# Altium PCB mchf_pro_ui.PcbDoc (part 4 of 7)
Units mil, origin at the board's own origin, x right, y up, seen from the top; angles counter-clockwise.
Board outline 7877.73 x 5661.04 mil, 2 copper layers (Top Layer, Bottom Layer); 345 components, 345 nets, 1318 pads, 783 vias.
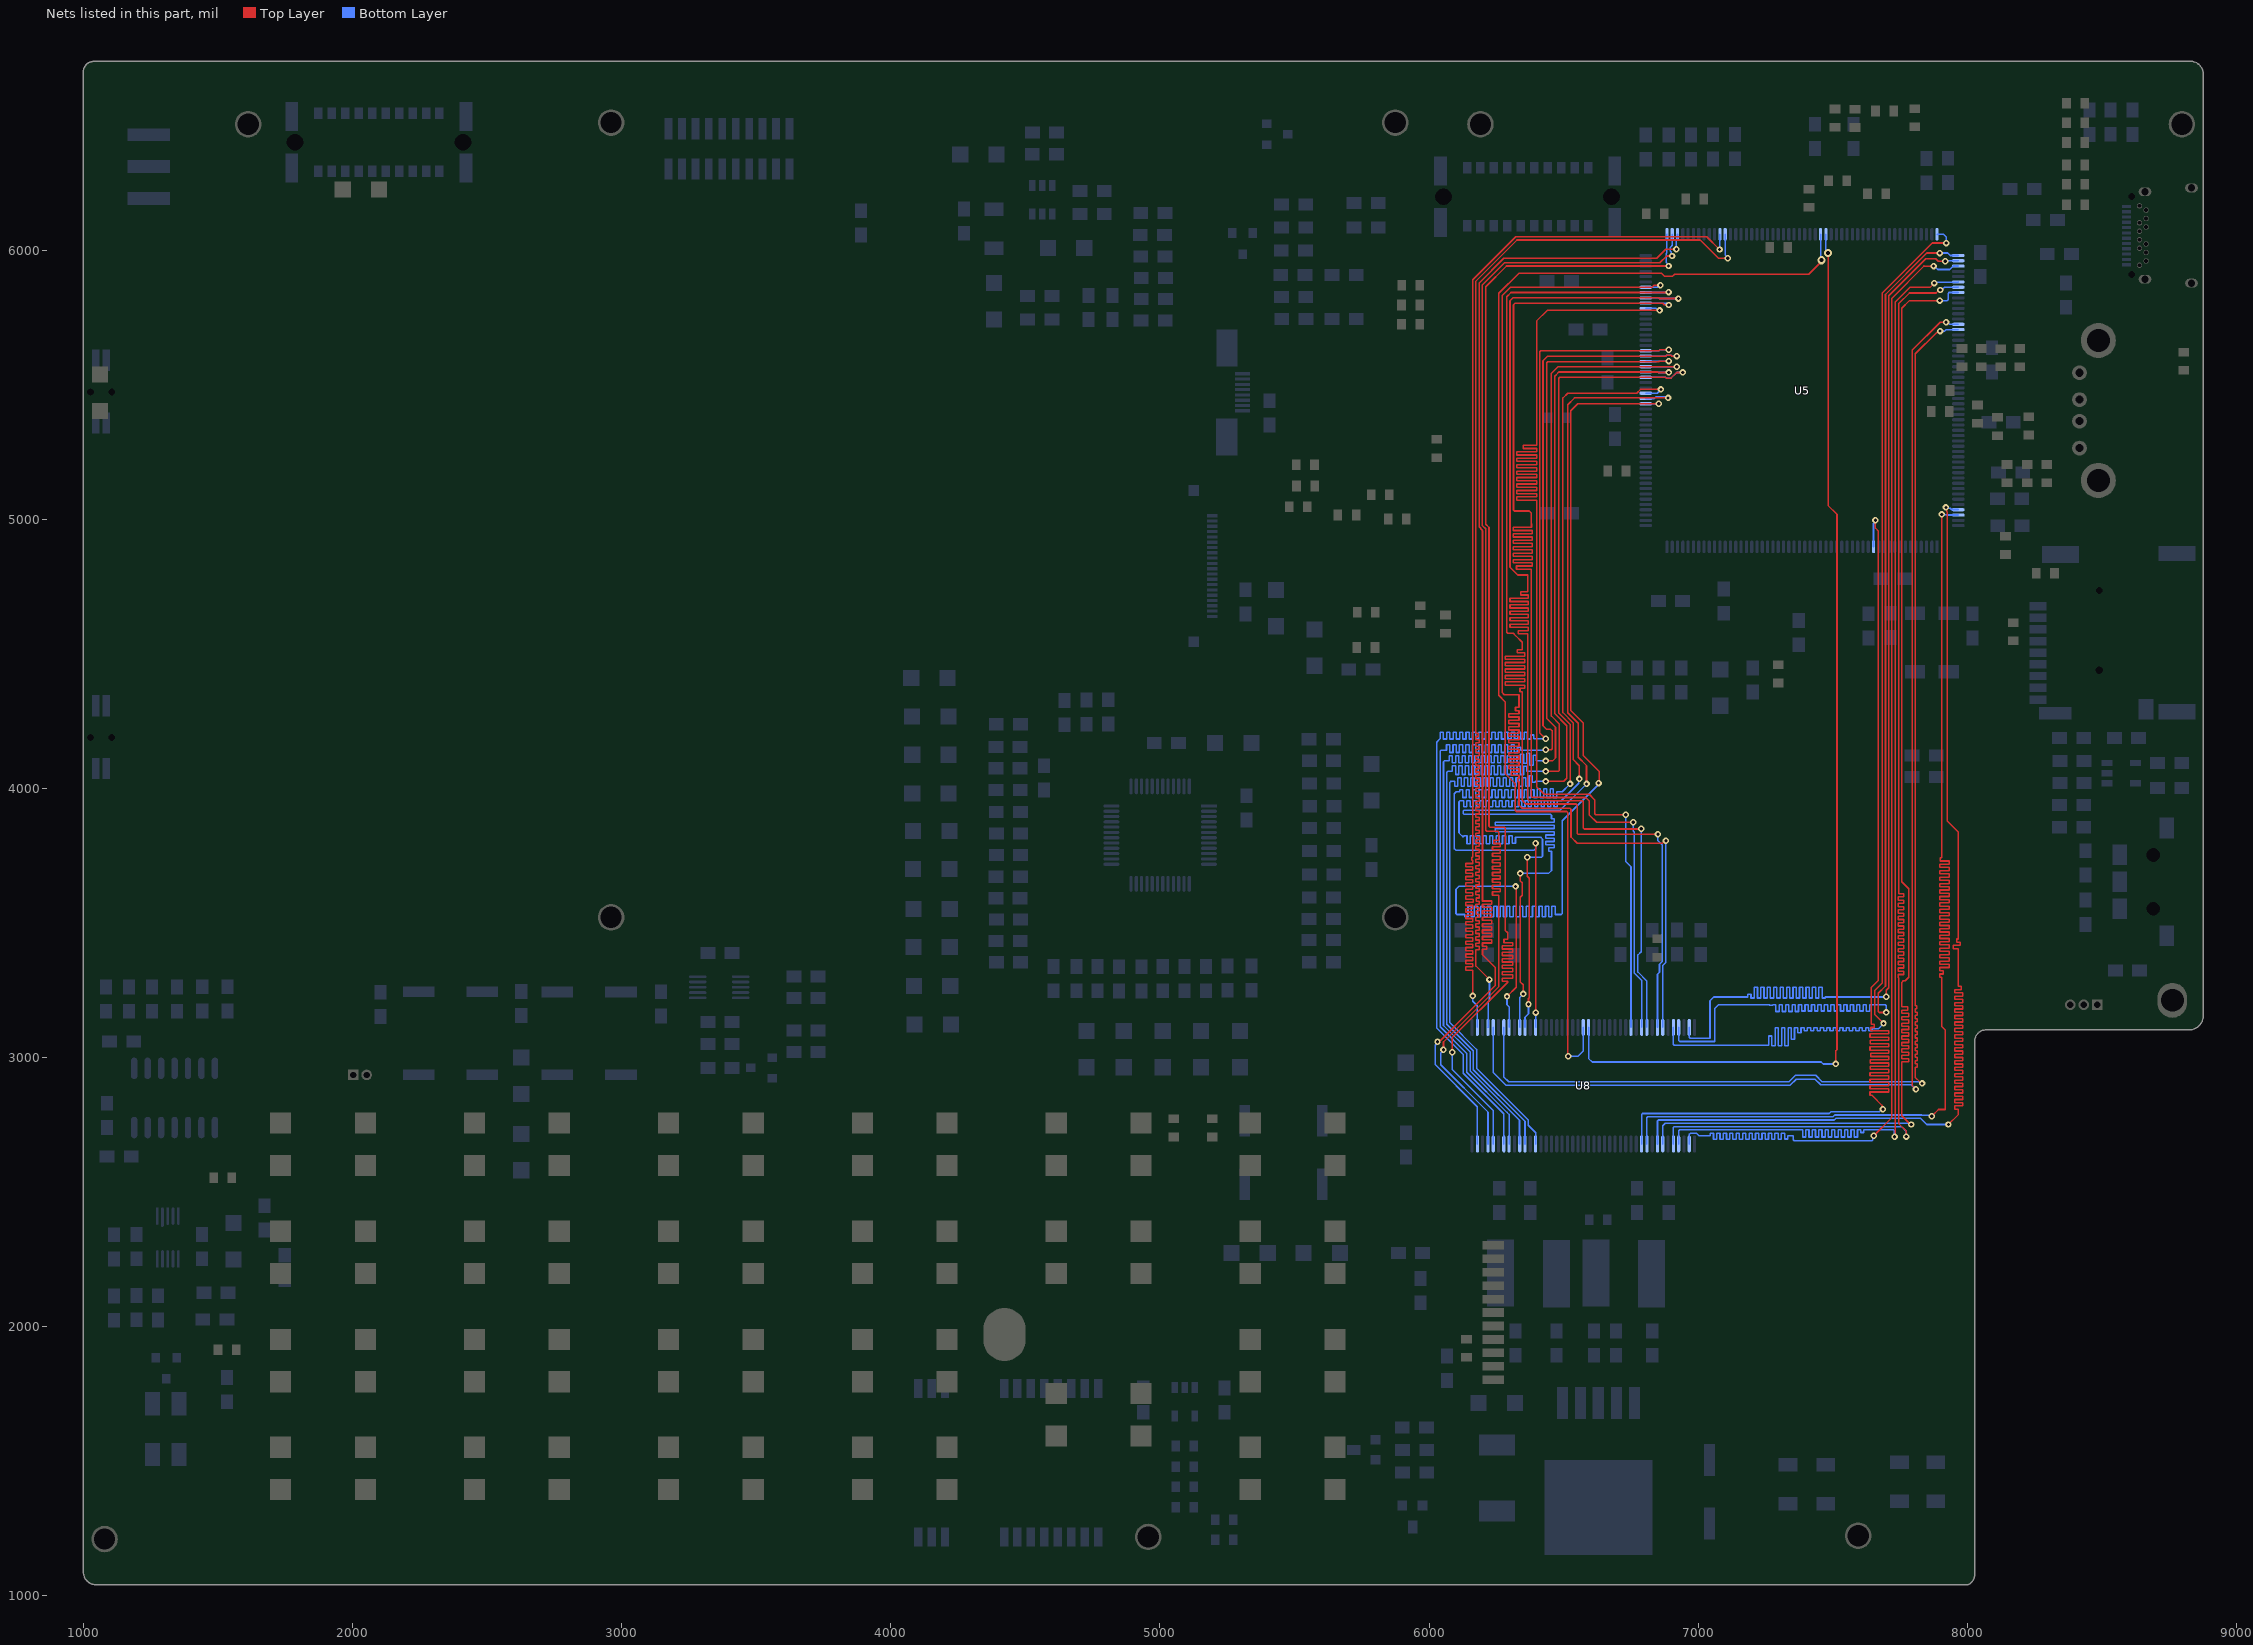
[diagram p3: the nets of this part, all layers, seen from the top]

## Via types
v1: diameter 24, hole 12, Top Layer to Bottom Layer, 779 vias
v2: diameter 30, hole 15, Top Layer to Bottom Layer, 4 vias

## Nets (pads, with @x,y where several pads share a name; then routed paths per layer and width w, separated by ;. In a path a pad name is that pad's centre, name@x,y a point inside that pad or via, vN(x,y) a via of type N, cw(c..) or ccw(c..) an arc to the next point about the centre after c; other vN are vias at no path point) (continued)
FMC_BA0: U5.134 U8.22 | length 4565.1
  Top Layer w6: v1(6517.54,3005.01) 6515.52,3007.03 6515.52,3911.33 6512.01,3914.85 6323.42,3914.85 6319.52,3918.74 6319.52,4018.98 6282.5,4056.01 6282.5,4322.66 6258.87,4346.29 6258.87,5840.13 6333.95,5915.21 6863.47,5915.21 6863.47,5914.26 6874.46,5903.27 6879.43,5903.27 6879.64,5903.48 6904.76,5903.48 6912.52,5911.24 7410.8,5911.24 7457.52,5957.97 v2(7457.52,5963.21)
  Bottom Layer w6: v1(6517.54,3005.01) 6553.39,3005.01 6573.08,3024.7 U8.22@6573.08,3112.61 ; U5.134@7454.69,6059.62 7454.69,5966.04 v2(7457.52,5963.21)
FMC_BA1: U5.135 U8.23 | length 4139.9
  Top Layer w6: v2(7482.52,5990.78) 7482.52,5051.78 7515.52,5018.78 7515.52,3030.03 7510.86,3025.36 v1(7510.86,2976.74)
  Bottom Layer w6: U8.23@6592.76,3112.61 6592.76,2997.38 6606.2,2983.95 7456.71,2983.95 7463.91,2976.74 v1(7510.86,2976.74) ; v2@7474.38,5991.21 U5.135@7474.38,6059.62
FMC_D0: U5.115 U8.2 | length 4744
  Top Layer w6: v1(6162.11,3229.59) 6162.11,3322.41 6162.11,3325.42 6135.99,3325.42 6135.99,3337.42 6162.11,3337.42 6162.11,3349.42 6135.99,3349.42 6135.99,3361.42 6162.11,3361.42 6162.11,3373.42 6135.99,3373.42 6135.99,3385.42 6162.11,3385.42 6162.11,3397.42 6135.99,3397.42 6135.99,3409.42 6162.11,3409.42 6162.11,3421.42 6135.99,3421.42 6135.99,3433.42 6162.11,3433.42 6162.11,3445.42 6135.99,3445.42 6135.99,3457.42 6162.11,3457.42 6162.11,3469.42 6135.99,3469.42 6135.99,3481.42 6162.11,3481.42 6162.11,3493.42 6135.99,3493.42 6135.99,3505.42 6162.11,3505.42 6162.11,3517.42 6135.99,3517.42 6135.99,3529.42 6162.86,3529.42 6162.86,3541.42 6135.99,3541.42 6135.99,3553.42 6162.11,3553.42 6162.11,3565.42 6135.99,3565.42 6135.99,3577.42 6163.62,3577.42 6163.62,3589.42 6135.99,3589.42 6135.99,3601.42 6162.11,3601.42 6162.11,3613.42 6135.99,3613.42 6135.99,3625.42 6162.25,3625.42 6162.25,3637.42 6135.99,3637.42 6135.99,3649.42 6162.11,3649.42 6162.11,3661.42 6135.99,3661.42 6135.99,3673.42 6162.11,3673.42 6162.11,3685.42 6135.99,3685.42 6135.99,3697.42 6162.11,3697.42 6162.11,3709.42 6135.99,3709.42 6135.99,3721.42 6162.11,3721.42 6162.11,3733.42 6159.22,3733.42 6159.22,3745.42 6162.11,3745.42 6162.11,3767.68 6162.11,5890.73 6321.65,6050.28 7032.16,6050.28 7079.36,6003.08 v1(7079.36,6003.02)
  Bottom Layer w6: v1(6162.11,3229.59) 6162.11,3209.87 6179.38,3192.6 U8.2@6179.38,3112.61 ; v1(7079.36,6003.02) 7079.36,6008.89 7080.68,6010.21 U5.115@7080.67,6059.62
FMC_D1: U5.116 U8.4 | length 4748.1
  Top Layer w6: v1(6224.37,3290.3) 6174.11,3340.56 6174.11,3386.58 6174.11,3401.58 6186.52,3401.58 6186.52,3413.58 6174.11,3413.58 6174.11,3425.58 6186.52,3425.58 6186.52,3437.58 6174.11,3437.58 6174.11,3449.58 6186.52,3449.58 6186.52,3461.58 6174.11,3461.58 6174.11,3473.58 6186.52,3473.58 6186.52,3485.58 6174.11,3485.58 6174.11,3497.58 6186.52,3497.58 6186.52,3509.58 6174.11,3509.58 6174.11,3521.58 6186.52,3521.58 6186.52,3533.58 6174.86,3533.58 6174.86,3545.58 6186.49,3545.58 6186.49,3557.58 6174.11,3557.58 6174.11,3569.58 6186.46,3569.58 6186.46,3581.58 6175.62,3581.58 6175.62,3593.58 6186.52,3593.58 6186.52,3605.58 6174.11,3605.58 6174.11,3617.58 6186.52,3617.58 6186.52,3629.58 6174.25,3629.58 6174.25,3641.58 6186.52,3641.58 6186.52,3653.58 6174.11,3653.58 6174.11,3665.58 6186.52,3665.58 6186.52,3677.58 6174.11,3677.58 6174.11,3689.58 6186.52,3689.58 6186.52,3701.58 6174.11,3701.58 6174.11,3713.58 6186.52,3713.58 6186.52,3725.58 6174.11,3725.58 6174.11,3737.58 6186.52,3737.58 6186.52,3749.58 6174.11,3749.58 6174.11,3761.58 6186.52,3761.58 6186.52,3773.58 6174.11,3773.58 6174.11,3785.58 6186.52,3785.58 6186.52,3797.58 6174.11,3797.58 6174.11,3809.58 6186.52,3809.58 6186.52,3821.58 6174.11,3821.58 6174.11,3833.58 6186.52,3833.58 6186.52,3845.58 6174.11,3845.58 6174.11,3857.58 6186.52,3857.58 6186.52,3869.58 6174.11,3869.58 6174.11,3881.58 6186.52,3881.58 6186.52,3893.58 6174.11,3893.58 6174.11,3905.58 6186.52,3905.58 6186.52,3917.58 6174.11,3917.58 6174.11,3929.58 6186.52,3929.58 6186.52,3941.58 6174.11,3941.58 6174.11,3953.58 6186.52,3953.58 6186.52,3965.58 6174.11,3965.58 6174.11,3977.58 6186.52,3977.58 6186.52,3989.58 6174.11,3989.58 6174.11,4001.58 6186.52,4001.58 6186.52,4013.58 6174.11,4013.58 6174.11,4025.58 6186.52,4025.58 6186.52,4037.58 6174.11,4037.58 6174.11,4049.58 6186.52,4049.58 6186.52,4061.58 6174.11,4061.58 6174.11,4073.58 6186.52,4073.58 6186.52,4085.58 6174.11,4085.58 6174.11,4097.58 6186.52,4097.58 6186.52,4109.58 6174.11,4109.58 6174.11,4121.58 6186.52,4121.58 6186.52,4133.58 6174.11,4133.58 6174.11,4145.58 6186.52,4145.58 6186.52,4157.58 6174.11,4157.58 6174.11,4169.58 6186.52,4169.58 6186.52,4181.58 6174.11,4181.58 6174.11,4193.58 6182.91,4193.58 6182.91,4205.58 6174.11,4205.58 6174.11,4219.52 6174.11,5885.76 6326.62,6038.28 7007.69,6038.28 7075.64,5970.33 v1(7109.62,5970.33)
  Bottom Layer w6: U8.4@6218.75,3112.61 6219.86,3113.72 6219.86,3207.44 6224.37,3211.95 v1(6224.37,3290.3) ; U5.116@7100.36,6059.62 7100.36,5982.84 7109.62,5973.59 v1(7109.62,5970.33)
FMC_D2: U5.170 U8.5 | length 4751.2
  Top Layer w6: v1(7808.85,2882.76) 7794.76,2896.85 7794.76,5628.17 7899.21,5732.62 v1(7920.96,5732.62)
  Bottom Layer w6: U8.5@6238.43,3112.61 6238.43,2945.25 6285.33,2898.36 7342.48,2898.36 7364.31,2920.18 7433.83,2920.18 7454.95,2899.07 7791.52,2899.07 7807.84,2882.76 v1(7808.85,2882.76) ; v1(7920.96,5732.62) 7925.83,5732.62 7933.47,5724.98 U5.170@7966.5,5724.98
FMC_D3: U5.171 U8.7 | length 4803.3
  Top Layer w6: v1@7825.76,2907.78 7806.76,2926.78 7806.76,2950.26 7806.76,2953.26 7806.76,2965.26 7813.76,2965.26 7813.76,2977.26 7806.76,2977.26 7806.76,2989.26 7813.76,2989.26 7813.76,3001.26 7806.76,3001.26 7806.76,3013.26 7813.76,3013.26 7813.76,3025.26 7806.76,3025.26 7806.76,3037.26 7813.76,3037.26 7813.76,3049.26 7806.76,3049.26 7806.76,3061.26 7813.76,3061.26 7813.76,3073.26 7806.76,3073.26 7806.76,3085.26 7813.76,3085.26 7813.76,3097.26 7806.76,3097.26 7806.76,3109.26 7813.76,3109.26 7813.76,3121.26 7806.76,3121.26 7806.76,3133.26 7813.76,3133.26 7813.76,3145.26 7806.76,3145.26 7806.76,3157.26 7813.76,3157.26 7813.76,3169.26 7806.76,3169.26 7806.76,3181.26 7812.16,3181.26 7812.16,3193.26 7806.76,3193.26 7806.76,3296.62 7806.76,3800.78 7806.76,5615.29 7886.04,5694.57 7888.44,5694.57 7893.65,5699.78 v1(7898.52,5699.78)
  Bottom Layer w6: U8.7@6277.8,3112.61 6277.8,2928.35 6295.79,2910.36 7337.51,2910.36 7361.65,2934.5 7436.49,2934.5 7459.92,2911.07 7820.51,2911.07 ; v1(7898.52,5699.78) 7898.7,5699.96 7916.01,5699.96 7921.34,5705.29 U5.171@7966.5,5705.29
  other v1: 7831.9,2904.55
FMC_D4: U5.76 U8.8 | length 4720.9
  Top Layer w6: v1@6295.17,3228.07 6294.88,3227.78 v1(6289.52,3227.78) 6323.42,3261.68 6323.42,3633.88 v1@6319.52,3637.78 ; v1(6630.04,4020.23) 6632.13,4022.33 6632.13,4063.52 6573.11,4122.54 6573.11,4243.72 6526.79,4290.04 6526.79,5403.9 6552.6,5429.7 v1(6853.76,5429.7)
  Bottom Layer w6: v1(6289.52,3227.78) 6289.52,3196.66 6297.49,3188.7 U8.8@6297.49,3112.61 ; v1@6295.17,3228.07 v1@6296.37,3226.87 ; v1(6321.47,3636.62) 6110.96,3636.62 6100.04,3625.7 6100.04,3535.67 6103.55,3532.15 6124.04,3532.15 6132.46,3532.15 6132.46,3523.48 6144.46,3523.48 6144.46,3562.79 6156.46,3562.79 6156.46,3523.48 6168.46,3523.48 6168.46,3562.79 6180.46,3562.79 6180.46,3523.48 6192.46,3523.48 6192.46,3562.79 6204.46,3562.79 6204.46,3523.48 6216.46,3523.48 6216.46,3562.79 6228.46,3562.79 6228.46,3523.48 6240.46,3523.48 6240.46,3562.79 6252.46,3562.79 6252.46,3523.48 6264.46,3523.48 6264.46,3562.79 6276.46,3562.79 6276.46,3523.48 6288.46,3523.48 6288.46,3562.79 6300.46,3562.79 6300.46,3523.48 6312.46,3523.48 6312.46,3562.79 6324.46,3562.79 6324.46,3523.48 6336.46,3523.48 6336.46,3562.79 6348.46,3562.79 6348.46,3523.48 6360.46,3523.48 6360.46,3562.79 6372.46,3562.79 6372.46,3523.48 6384.46,3523.48 6384.46,3562.79 6396.46,3562.79 6396.46,3523.48 6408.46,3523.48 6408.46,3562.79 6420.46,3562.79 6420.46,3523.48 6432.46,3523.48 6432.46,3562.79 6444.46,3562.79 6444.46,3523.48 6456.46,3523.48 6456.46,3562.79 6468.46,3562.79 6468.46,3532.15 6483.46,3532.15 6490.82,3532.15 6494.34,3535.67 6494.34,3879.96 6630.04,4015.66 v1(6630.04,4020.23) ; U5.76@6805.08,5429.7 v1(6853.76,5429.7)
FMC_D5: U5.77 U8.10 | length 4714.2
  Top Layer w6: v1(6339.17,3684.83) 6339.17,3656.37 6345.95,3649.6 6345.95,3603.2 6339.17,3596.43 6339.17,3281.6 6350.04,3270.73 v1(6350.04,3237.07) ; v1(6585.11,4017.35) 6585.11,4085.44 6554.04,4116.51 6554.04,4242.66 6514.79,4281.91 6514.79,5426.24 6540.11,5451.56 v1(6888.27,5451.56)
  Bottom Layer w6: U8.10@6337.54,3113.29 U8.10@6336.86,3112.61 6336.86,3223.89 v1(6350.04,3237.07) ; v1(6339.17,3684.83) 6443.99,3684.83 6454.97,3695.81 6454.97,3709.43 6454.97,3767.58 6444.97,3767.58 6444.97,3779.58 6465.8,3779.58 6465.8,3791.58 6433.52,3791.58 6433.52,3803.58 6465.8,3803.58 6465.8,3815.58 6433.06,3815.58 6433.06,3827.58 6465.8,3827.58 6465.8,3839.58 6245.84,3839.58 6245.84,3851.58 6465.8,3851.58 6465.8,3863.58 6245.84,3863.58 6245.84,3875.58 6465.8,3875.58 6465.8,3887.58 6454.97,3887.58 6454.97,3890.58 6454.97,3900.49 6451.45,3904.01 6130.72,3904.01 6127.21,3907.52 6127.21,3916.61 6130.72,3920.13 6457.39,3920.13 6474.65,3920.13 6481.27,3920.13 6487.89,3920.13 v1(6585.11,4017.35) ; U5.77@6805.08,5449.39 6837.37,5449.39 6843.7,5455.72 6875.76,5455.72 6876.48,5455 6884.83,5455 v1(6888.27,5451.56)
FMC_D6: U5.78 U8.11 | length 4712.2
  Top Layer w6: v1(6364.52,3744.78) 6364.52,3673.85 6371.86,3666.52 6371.86,3223.15 6369.49,3220.78 v1(6369.49,3198.24) ; v1(6558.52,4035.78) 6558.52,4085.18 6536.01,4107.69 6536.01,4243.72 6497.28,4282.45 6497.28,5451.56 6514.79,5469.07 6771.49,5469.07 6785.51,5483.09 v1(6861.56,5483.09)
  Bottom Layer w6: U8.11@6356.54,3112.61 6356.54,3150.83 6369.49,3163.78 v1(6369.49,3198.24) ; v1(6364.52,3744.78) 6417.38,3744.78 6421.52,3748.92 6421.52,3812.28 6414.47,3819.33 6351.9,3819.33 6320.93,3819.33 6320.93,3796.19 6308.93,3796.19 6308.93,3824.4 6296.93,3824.4 6296.93,3795.41 6284.93,3795.41 6284.93,3824.4 6272.93,3824.4 6272.93,3795.41 6260.93,3795.41 6260.93,3824.4 6248.93,3824.4 6248.93,3795.41 6236.93,3795.41 6236.93,3824.4 6224.93,3824.4 6224.93,3795.41 6212.93,3795.41 6212.93,3824.4 6200.93,3824.4 6200.93,3795.41 6188.93,3795.41 6188.93,3824.4 6176.93,3824.4 6176.93,3795.41 6164.93,3795.41 6164.93,3824.4 6152.93,3824.4 6152.93,3795.41 6140.93,3795.41 6140.93,3824.4 6128.93,3824.4 6128.93,3821.12 6125.41,3821.12 6122.41,3824.12 6111.3,3835.23 6111.3,3951.35 6114.81,3954.87 6121.3,3954.87 6128.3,3954.87 6128.3,3932.13 6140.3,3932.13 6140.3,3954.87 6152.3,3954.87 6152.3,3932.13 6164.3,3932.13 6164.3,3954.87 6176.3,3954.87 6176.3,3932.13 6188.3,3932.13 6188.3,3954.87 6200.3,3954.87 6200.3,3932.13 6212.3,3932.13 6212.3,3954.87 6224.3,3954.87 6224.3,3932.13 6236.3,3932.13 6236.3,3954.87 6248.3,3954.87 6248.3,3932.13 6260.3,3932.13 6260.3,3954.87 6272.3,3954.87 6272.3,3932.13 6284.3,3932.13 6284.3,3954.87 6296.3,3954.87 6296.3,3932.13 6308.3,3932.13 6308.3,3954.87 6320.3,3954.87 6320.3,3932.13 6332.3,3932.13 6332.3,3954.87 6344.3,3954.87 6344.3,3932.13 6356.3,3932.13 6356.3,3954.87 6368.3,3954.87 6368.3,3932.13 6380.3,3932.13 6380.3,3954.87 6392.3,3954.87 6392.3,3932.13 6404.3,3932.13 6404.3,3954.87 6416.3,3954.87 6416.3,3932.13 6428.3,3932.13 6428.3,3954.87 6440.3,3954.87 6440.3,3932.13 6452.3,3932.13 6452.3,3954.87 6464.3,3954.87 6464.3,3932.13 6476.3,3932.13 6476.3,3954.87 6479.3,3954.87 6491.03,3954.87 6556.39,4020.22 6556.39,4033.65 v1(6558.52,4035.78) ; U5.78@6805.08,5469.07 6847.54,5469.07 v1(6861.56,5483.09)
FMC_D7: U5.81 U8.13 | length 4705.1
  Top Layer w6: v1(6395.91,3796.92) 6396.1,3796.72 v1(6396.1,3167.53) ; v1(6523.91,4017.44) 6524.01,4017.54 6524.01,4238.75 6482.28,4280.48 6482.28,5524.69 6485.79,5528.21 6878.82,5528.21 6881.82,5525.21 6899.22,5525.21 6920.22,5546.21 v1(6942.88,5546.21)
  Bottom Layer w6: U8.13@6395.91,3112.61 6396.1,3112.8 v1(6396.1,3167.53) ; v1(6395.91,3796.92) 6395.91,3776.34 6391.02,3771.45 6098.72,3771.45 6093.55,3776.62 6093.55,3980.47 6100.78,3987.7 6110.71,3987.7 6113.71,3987.7 6113.71,3996.25 6125.71,3996.25 6125.71,3966.87 6137.71,3966.87 6137.71,3996.25 6149.71,3996.25 6149.71,3966.87 6161.71,3966.87 6161.71,3996.25 6173.71,3996.25 6173.71,3966.87 6185.71,3966.87 6185.71,3996.25 6197.71,3996.25 6197.71,3966.87 6209.71,3966.87 6209.71,3996.25 6221.71,3996.25 6221.71,3966.87 6233.71,3966.87 6233.71,3996.25 6245.71,3996.25 6245.71,3966.87 6257.71,3966.87 6257.71,3996.25 6269.71,3996.25 6269.71,3966.87 6281.71,3966.87 6281.71,3996.25 6293.71,3996.25 6293.71,3966.87 6305.71,3966.87 6305.71,3996.25 6317.71,3996.25 6317.71,3966.87 6329.71,3966.87 6329.71,3996.25 6341.71,3996.25 6341.71,3966.87 6353.71,3966.87 6353.71,3996.25 6365.71,3996.25 6365.71,3966.87 6377.71,3966.87 6377.71,3996.25 6389.71,3996.25 6389.71,3966.87 6401.71,3966.87 6401.71,3999.24 6413.71,3999.24 6413.71,3966.87 6425.71,3966.87 6425.71,3999.24 6437.71,3999.24 6437.71,3966.87 6449.71,3966.87 6449.71,3999.24 6461.71,3999.24 6461.71,3966.87 6473.71,3966.87 6473.71,3987.7 6479.3,3987.7 6494.36,3987.7 6523.91,4017.25 v1(6523.91,4017.44) ; U5.81@6805.08,5528.13 6805.16,5528.21 6878.82,5528.21 6881.82,5525.21 6899.22,5525.21 6920.22,5546.21 v1(6942.88,5546.21)
FMC_D8: U5.82 U8.74 | length 4740.3
  Top Layer w6: v1(6433.52,4026.78) 6500.07,4026.78 6512.01,4038.71 6512.01,4233.78 6466.52,4279.27 6466.52,5531.78 6478.76,5544.02 6478.76,5544.3 6482.28,5547.81 6850.37,5547.81 6851.97,5546.21 v1(6890.52,5546.21)
  Bottom Layer w6: U8.74@6395.91,2679.53 6395.91,2721.32 6368.54,2748.69 6368.54,2768.65 6176.52,2960.66 6176.52,3030.81 6077.52,3129.81 6077.52,4023.27 6080.11,4025.86 6081.04,4026.78 6095.11,4026.78 6095.11,4008.25 6107.11,4008.25 6107.11,4040.43 6119.11,4040.43 6119.11,4008.25 6131.11,4008.25 6131.11,4040.43 6143.11,4040.43 6143.11,4008.25 6155.11,4008.25 6155.11,4040.43 6167.11,4040.43 6167.11,4008.25 6179.11,4008.25 6179.11,4040.43 6191.11,4040.43 6191.11,4008.25 6203.11,4008.25 6203.11,4040.43 6215.11,4040.43 6215.11,4008.25 6227.11,4008.25 6227.11,4040.43 6239.11,4040.43 6239.11,4008.25 6251.11,4008.25 6251.11,4040.43 6263.11,4040.43 6263.11,4008.25 6275.11,4008.25 6275.11,4040.43 6287.11,4040.43 6287.11,4008.25 6299.11,4008.25 6299.11,4040.43 6311.11,4040.43 6311.11,4008.25 6323.11,4008.25 6323.11,4040.43 6335.11,4040.43 6335.11,4008.25 6347.11,4008.25 6347.11,4040.43 6359.11,4040.43 6359.11,4008.25 6371.11,4008.25 6371.11,4048.25 6383.11,4048.25 6383.11,4023.57 6395.11,4023.57 6395.11,4026.78 6404.49,4026.78 v1(6433.52,4026.78) ; U5.82@6805.08,5547.81 6850.37,5547.81 6851.97,5546.21 v1(6890.52,5546.21)
FMC_D9: U5.83 U8.76 | length 4740.2
  Top Layer w6: v1(6433.52,4063.78) 6479.62,4063.78 6483.14,4067.3 6483.14,4240.94 6454.52,4269.56 6454.52,5542.97 6478.76,5567.21 6878.76,5567.21 6879.05,5567.5 v1(6920.28,5567.5)
  Bottom Layer w6: U8.76@6356.54,2679.53 6356.54,2763.67 6164.52,2955.69 6164.52,3025.84 6065.52,3124.84 6065.52,4060.27 6069.04,4063.78 6083.8,4063.78 6086.8,4063.78 6086.8,4084.33 6098.8,4084.33 6098.8,4052.43 6110.8,4052.43 6110.8,4084.33 6122.8,4084.33 6122.8,4052.43 6134.8,4052.43 6134.8,4084.33 6146.8,4084.33 6146.8,4052.43 6158.8,4052.43 6158.8,4084.33 6170.8,4084.33 6170.8,4052.43 6182.8,4052.43 6182.8,4084.33 6194.8,4084.33 6194.8,4052.43 6206.8,4052.43 6206.8,4084.33 6218.8,4084.33 6218.8,4052.43 6230.8,4052.43 6230.8,4084.33 6242.8,4084.33 6242.8,4052.43 6254.8,4052.43 6254.8,4084.33 6266.8,4084.33 6266.8,4052.43 6278.8,4052.43 6278.8,4084.33 6290.8,4084.33 6290.8,4052.43 6302.8,4052.43 6302.8,4084.33 6314.8,4084.33 6314.8,4052.43 6326.8,4052.43 6326.8,4084.33 6338.8,4084.33 6338.8,4052.43 6350.8,4052.43 6350.8,4082.78 6362.8,4082.78 6362.8,4063.78 6374.8,4063.78 6427.79,4063.78 v1(6433.52,4063.78) ; U5.83@6805.08,5567.5 v1(6920.28,5567.5)
FMC_D10: U5.84 U8.77 | length 4741.8
  Top Layer w6: v1(6433.52,4102.78) 6458.76,4102.78 6469.91,4113.92 6469.91,4228.4 6437.71,4260.59 6437.71,5582.69 6441.23,5586.21 6853.47,5586.21 6855.76,5588.5 v1(6890.52,5588.5)
  Bottom Layer w6: U8.77@6336.86,2679.53 6336.04,2680.35 6336.04,2767.2 6152.52,2950.72 6152.52,3020.87 6053.52,3119.87 6053.52,4099.27 6057.04,4102.78 6071.72,4102.78 6074.72,4102.78 6074.72,4121.9 6086.72,4121.9 6086.72,4096.33 6098.72,4096.33 6098.72,4121.9 6110.72,4121.9 6110.72,4096.33 6122.72,4096.33 6122.72,4121.9 6134.72,4121.9 6134.72,4096.33 6146.72,4096.33 6146.72,4121.9 6158.72,4121.9 6158.72,4096.33 6170.72,4096.33 6170.72,4121.9 6182.72,4121.9 6182.72,4096.33 6194.72,4096.33 6194.72,4121.9 6206.72,4121.9 6206.72,4096.33 6218.72,4096.33 6218.72,4121.9 6230.72,4121.9 6230.72,4096.33 6242.72,4096.33 6242.72,4121.9 6254.72,4121.9 6254.72,4096.33 6266.72,4096.33 6266.72,4121.9 6278.72,4121.9 6278.72,4096.33 6290.72,4096.33 6290.72,4121.9 6302.72,4121.9 6302.72,4096.33 6314.72,4096.33 6314.72,4121.9 6326.72,4121.9 6326.72,4096.33 6338.72,4096.33 6338.72,4127.19 6350.72,4127.19 6350.72,4094.78 6362.72,4094.78 6362.72,4130.76 6374.72,4130.76 6374.72,4086.49 6386.72,4086.49 6386.72,4124.09 6398.72,4124.09 6398.72,4102.78 6408.69,4102.78 v1(6433.52,4102.78) ; U5.84@6805.08,5587.18 6805.43,5586.84 6843.25,5586.84 6844.9,5588.5 v1(6890.52,5588.5)
FMC_D11: U5.85 U8.79 | length 4740.2
  Top Layer w6: v1(6433.52,4144.35) 6454.09,4144.35 6457.61,4147.86 6457.61,4214.7 6452.52,4219.78 6437.52,4219.78 6423.52,4233.78 6423.52,5590.11 6440.28,5606.87 6879.19,5606.87 6881.82,5609.5 6899.22,5609.5 6901.85,5606.87 v1(6920.28,5606.87)
  Bottom Layer w6: U8.79@6297.49,2679.53 6297.49,2788.64 6289.8,2796.33 6289.8,2796.47 6140.52,2945.75 6140.52,3015.78 6041.52,3114.78 6041.52,4139.24 6045.04,4142.76 6061.78,4142.76 6064.78,4142.76 6064.78,4163.16 6076.78,4163.16 6076.78,4133.9 6088.78,4133.9 6088.78,4163.16 6100.78,4163.16 6100.78,4133.9 6112.78,4133.9 6112.78,4163.16 6124.78,4163.16 6124.78,4133.9 6136.78,4133.9 6136.78,4163.16 6148.78,4163.16 6148.78,4133.9 6160.78,4133.9 6160.78,4163.16 6172.78,4163.16 6172.78,4133.9 6184.78,4133.9 6184.78,4163.16 6196.78,4163.16 6196.78,4133.9 6208.78,4133.9 6208.78,4163.16 6220.78,4163.16 6220.78,4133.9 6232.78,4133.9 6232.78,4163.16 6244.78,4163.16 6244.78,4133.9 6256.78,4133.9 6256.78,4163.16 6268.78,4163.16 6268.78,4133.9 6280.78,4133.9 6280.78,4163.16 6292.78,4163.16 6292.78,4133.9 6304.78,4133.9 6304.78,4163.16 6316.78,4163.16 6316.78,4133.9 6328.78,4133.9 6328.78,4154.12 6340.78,4154.12 6340.78,4142.76 6401.17,4142.76 6431.93,4142.76 v1(6433.52,4144.35) ; U5.85@6805.08,5606.87 6879.19,5606.87 6881.82,5609.5 6899.22,5609.5 6901.85,5606.87 v1(6920.28,5606.87)
FMC_D12: U5.86 U8.80 | length 4740.2
  Top Layer w6: v1(6433.52,4184.78) 6411.52,4206.78 6411.52,5623.04 6415.04,5626.55 6853.76,5626.55 6857.71,5630.5 v1(6890.52,5630.5)
  Bottom Layer w6: U8.80@6277.8,2679.53 6277.8,2791.5 6127.21,2942.1 6127.21,3011.96 6028.52,3110.65 6028.52,4172.63 6038.29,4182.4 6040.67,4184.78 6041.29,4184.78 6041.29,4208.84 6053.29,4208.84 6053.29,4184.24 6065.29,4184.24 6065.29,4208.84 6077.29,4208.84 6077.29,4184.24 6089.29,4184.24 6089.29,4208.84 6101.29,4208.84 6101.29,4184.24 6113.29,4184.24 6113.29,4208.84 6125.29,4208.84 6125.29,4184.24 6137.29,4184.24 6137.29,4208.84 6149.29,4208.84 6149.29,4184.24 6161.29,4184.24 6161.29,4208.84 6173.29,4208.84 6173.29,4184.24 6185.29,4184.24 6185.29,4208.84 6197.29,4208.84 6197.29,4184.24 6209.29,4184.24 6209.29,4208.84 6221.29,4208.84 6221.29,4184.24 6233.29,4184.24 6233.29,4208.84 6245.29,4208.84 6245.29,4184.24 6257.29,4184.24 6257.29,4208.84 6269.29,4208.84 6269.29,4184.24 6281.29,4184.24 6281.29,4208.84 6293.29,4208.84 6293.29,4184.24 6305.29,4184.24 6305.29,4208.84 6317.29,4208.84 6317.29,4184.24 6329.29,4184.24 6329.29,4208.84 6341.29,4208.84 6341.29,4184.24 6353.29,4184.24 6353.29,4208.84 6365.29,4208.84 6365.29,4184.24 6377.29,4184.24 6377.29,4198.92 6389.29,4198.92 6389.29,4184.78 6403,4184.78 v1(6433.52,4184.78) ; U5.86@6805.08,5626.55 6853.76,5626.55 6857.71,5630.5 v1(6890.52,5630.5)
FMC_D13: U5.105 U8.82 | length 4738.7
  Top Layer w6: v1@6085.52,3021.78 6085.52,3073.78 6292.52,3280.78 6292.52,3283.78 6271.45,3283.78 6271.45,3295.78 6311.42,3295.78 6311.42,3307.78 6271.45,3307.78 6271.45,3319.78 6311.42,3319.78 6311.42,3331.78 6271.45,3331.78 6271.45,3343.78 6311.42,3343.78 6311.42,3355.78 6271.45,3355.78 6271.45,3367.78 6311.42,3367.78 6311.42,3379.78 6271.45,3379.78 6271.45,3391.78 6311.42,3391.78 6311.42,3403.78 6271.45,3403.78 6271.45,3415.78 6311.42,3415.78 6311.42,3427.78 6278.28,3427.78 6278.28,3439.78 6292.52,3439.78 6292.52,3460.41 6292.52,3464.1 6282.5,3474.12 6282.5,3853.38 6278.98,3856.89 6226.04,3856.89 6222.52,3860.41 6222.52,4970.27 6210.52,4982.27 6210.52,5864.56 6287.47,5941.51 6889.57,5941.51 v1(6889.83,5941.78)
  Bottom Layer w6: v1(6086.29,3020.35) 6086.29,2956.01 6238.43,2803.87 U8.82@6238.43,2679.53 ; U5.105@6883.82,6059.62 6883.82,5990.81 6881.89,5988.87 6881.89,5954.59 6889.83,5946.65 v1(6889.83,5941.78)
FMC_D14: U5.106 U8.83 | length 4752.2
  Top Layer w6: v1(6053.52,3029.78) 6053.52,3058.75 6259.45,3264.68 6259.45,3601.12 6259.45,3604.12 6235.51,3604.12 6235.51,3616.12 6265.1,3616.12 6265.1,3628.12 6235.51,3628.12 6235.51,3640.12 6265.1,3640.12 6265.1,3652.12 6235.51,3652.12 6235.51,3664.12 6265.1,3664.12 6265.1,3676.12 6235.51,3676.12 6235.51,3688.12 6265.1,3688.12 6265.1,3700.12 6235.51,3700.12 6235.51,3712.12 6265.1,3712.12 6265.1,3724.12 6235.51,3724.12 6235.51,3736.12 6265.1,3736.12 6265.1,3748.12 6235.51,3748.12 6235.51,3760.12 6265.1,3760.12 6265.1,3772.12 6235.51,3772.12 6235.51,3784.12 6265.1,3784.12 6265.1,3796.12 6239.85,3796.12 6239.85,3808.12 6259.45,3808.12 6259.45,3823.51 6259.45,3838.39 6255.93,3841.9 6214.04,3841.9 6210.52,3845.42 6210.52,4965.3 6198.11,4977.71 6198.11,5871.08 6280.55,5953.51 6857.3,5953.51 6882.63,5978.85 v1(6902.89,5978.85)
  Bottom Layer w6: v1(6053.52,3029.78) 6053.52,3027.7 6043.09,3017.27 6043.09,2973.6 6218.75,2797.95 U8.83@6218.75,2679.53 ; v1(6902.89,5978.85) 6899.44,5982.29 6899.44,5993.97 6896.69,5996.72 6896.69,6011.74 6903.51,6018.56 U5.106@6903.51,6059.62
FMC_D15: U5.107 U8.85 | length 4732.7
  Top Layer w6: v1@6030.52,3060.78 6037.6,3060.78 6042.09,3065.27 6043.07,3065.27 6148.06,3170.26 6246.02,3268.23 6246.02,3335.28 6198.52,3382.78 6198.52,3384.22 6198.52,3402.38 6214.41,3402.38 6214.41,3414.38 6198.52,3414.38 6198.52,3426.38 6232.37,3426.38 6232.37,3438.38 6198.52,3438.38 6198.52,3450.38 6232.37,3450.38 6232.37,3462.38 6198.52,3462.38 6198.52,3474.38 6232.37,3474.38 6232.37,3486.38 6198.52,3486.38 6198.52,3498.38 6232.37,3498.38 6232.37,3510.38 6198.52,3510.38 6198.52,3522.38 6232.37,3522.38 6232.37,3534.38 6198.52,3534.38 6198.52,3546.38 6232.37,3546.38 6232.37,3558.38 6198.46,3558.38 6198.46,3570.38 6232.37,3570.38 6232.37,3582.38 6198.52,3582.38 6198.52,3585.38 6198.52,4958.07 6198.12,4960.38 6186.11,4972.39 6186.11,5878.79 6277.54,5970.22 6845.77,5970.22 6879.77,6004.23 v1(6918.88,6004.23)
  Bottom Layer w6: v1(6031.29,3059.35) 6031.29,3055.61 6022.52,3046.83 6022.52,2975.18 6179.38,2818.32 U8.85@6179.38,2679.53 ; v1(6918.88,6004.23) 6918.88,6036.02 6923.19,6040.33 U5.107@6923.19,6059.62
FMC_D16: U5.94 U8.31 | length 4735.7
  Top Layer w6: v1(6730.52,3902.78) 6619.62,3902.78 6616.11,3906.3 6616.11,3957.78 6595.11,3978.78 6427.93,3978.78 6399.52,4007.19 6399.52,5068.66 6399.52,5071.66 6325.73,5071.66 6325.73,5083.66 6399.52,5083.66 6399.52,5095.66 6325.73,5095.66 6325.73,5107.66 6399.52,5107.66 6399.52,5119.66 6325.73,5119.66 6325.73,5131.66 6399.52,5131.66 6399.52,5143.66 6325.73,5143.66 6325.73,5155.66 6399.52,5155.66 6399.52,5167.66 6325.73,5167.66 6325.73,5179.66 6399.52,5179.66 6399.52,5191.66 6325.73,5191.66 6325.73,5203.66 6399.52,5203.66 6399.52,5215.66 6325.73,5215.66 6325.73,5227.66 6399.52,5227.66 6399.52,5239.66 6325.73,5239.66 6325.73,5251.66 6399.52,5251.66 6399.52,5263.66 6350,5263.66 6350,5275.66 6399.52,5275.66 6399.52,5306.24 6399.52,5736.97 6439.75,5777.19 v1@6853.76,5777.19
  Bottom Layer w6: v1@6730.52,3903.82 6730.52,3728.94 6750.24,3709.22 U8.31@6750.24,3112.61 ; U5.94@6805.08,5784.03 6843.25,5784.03 6850.09,5777.19 v1@6853.76,5777.19
  other v1: 6856.52,5776.78
FMC_D17: U5.95 U8.33 | length 4732
  Top Layer w6: v1(6758.52,3874.78) 6622.52,3874.78 6595.52,3901.78 6595.52,3953.78 6582.52,3966.78 6422.96,3966.78 6422.58,3967.17 6383.79,3967.17 6380.28,3970.68 6380.28,4811.92 6380.28,4814.92 6325.01,4814.92 6325.01,4826.92 6383.81,4826.92 6383.81,4838.92 6312.89,4838.92 6312.89,4850.92 6383.81,4850.92 6383.81,4862.92 6312.89,4862.92 6312.89,4874.92 6383.81,4874.92 6383.81,4886.92 6312.89,4886.92 6312.89,4898.92 6383.81,4898.92 6383.81,4910.92 6312.89,4910.92 6312.89,4922.92 6383.81,4922.92 6383.81,4934.92 6312.89,4934.92 6312.89,4946.92 6383.81,4946.92 6383.81,4958.92 6312.89,4958.92 6312.89,4970.92 6380.54,4970.92 6380.54,4982.92 6380.28,4982.92 6380.28,5017.29 6380.28,5022.66 6371.7,5031.24 6317.52,5031.24 6313.73,5035.03 6313.73,5798.13 6319.31,5803.72 6867.97,5803.72 6873.87,5797.82 6889.48,5797.82 v1(6890.52,5796.78)
  Bottom Layer w6: v1(6758.52,3874.78) 6758.52,3841.99 6762.98,3837.53 6762.98,3314.32 6789.61,3287.69 U8.33@6789.61,3112.61 ; U5.95@6805.08,5803.72 v1@6882.76,5803.72
FMC_D18: U5.96 U8.34 | length 4740.2
  Top Layer w6: v1(6788.22,3850.93) 6787.08,3849.78 6576.62,3849.78 6573.11,3853.3 6573.11,3951.27 6569.59,3954.78 6417.99,3954.78 6417.6,3955.17 6371.86,3955.17 6367.28,3959.75 6367.28,4572.08 6367.28,4575.08 6331.5,4575.08 6331.5,4587.08 6368.28,4587.08 6368.28,4599.08 6300.89,4599.08 6300.89,4611.08 6368.28,4611.08 6368.28,4623.08 6300.89,4623.08 6300.89,4635.08 6368.28,4635.08 6368.28,4647.08 6300.89,4647.08 6300.89,4659.08 6368.28,4659.08 6368.28,4671.08 6300.89,4671.08 6300.89,4683.08 6368.28,4683.08 6368.28,4695.08 6300.89,4695.08 6300.89,4707.08 6368.28,4707.08 6368.28,4719.08 6339.99,4719.08 6339.99,4731.08 6367.28,4731.08 6367.28,4765.73 6367.28,4793.58 6329.38,4793.58 6300.89,4822.08 6300.89,5812.79 6311.5,5823.4 6853.76,5823.4 6856.38,5820.78 v1(6926.63,5820.78)
  Bottom Layer w6: v1(6788.22,3850.93) 6788.22,3393.87 6775.93,3381.59 6775.93,3318.34 6809.3,3284.98 U8.34@6809.3,3112.61 ; U5.96@6805.08,5823.4 6853.76,5823.4 6856.38,5820.78 v1(6926.63,5820.78)
FMC_D19: U5.97 U8.36 | length 4740.2
  Top Layer w6: v1(6850.33,3829.93) 6554.04,3829.93 6550.52,3833.44 6550.52,3939.27 6547.01,3942.78 6413.02,3942.78 6412.89,3942.91 6359.25,3942.91 6345.95,3956.21 6345.95,4357.34 6345.95,4360.34 6337.84,4360.34 6337.84,4372.34 6355.28,4372.34 6355.28,4384.34 6283.45,4384.34 6283.45,4396.34 6355.28,4396.34 6355.28,4408.34 6283.45,4408.34 6283.45,4420.34 6355.28,4420.34 6355.28,4432.34 6283.45,4432.34 6283.45,4444.34 6355.28,4444.34 6355.28,4456.34 6283.45,4456.34 6283.45,4468.34 6355.28,4468.34 6355.28,4480.34 6283.45,4480.34 6283.45,4492.34 6355.28,4492.34 6355.28,4504.34 6328.12,4504.34 6328.12,4516.34 6345.95,4516.34 6345.95,4543.67 6321.04,4568.57 6312.25,4577.37 6292.4,4577.37 6288.89,4580.88 6288.89,5827.81 6304.17,5843.09 6888.4,5843.09 v1(6890.1,5844.78)
  Bottom Layer w6: U5.97@6805.08,5843.09 6888.4,5843.09 v1(6890.1,5844.78) ; U8.36@6848.67,3112.61 6848.67,3309.65 6856.35,3317.33 6856.35,3347.77 6867.11,3358.53 6867.11,3789.42 6850.33,3806.21 v1(6850.33,3829.93)
FMC_D20: U5.98 U8.37 | length 4741.8
  Top Layer w6: v1(6859.52,5869.78) 6835.53,5869.78 6828.52,5862.77 6302.18,5862.77 6271.45,5832.04 6271.45,4357.34 6279.8,4348.99 6333.95,4348.99 6333.95,4301.81 6321.08,4301.81 6321.08,4289.81 6333.95,4289.81 6333.95,4277.81 6296.74,4277.81 6296.74,4265.81 6333.95,4265.81 6333.95,4253.81 6296.74,4253.81 6296.74,4241.81 6333.95,4241.81 6333.95,4229.81 6296.74,4229.81 6296.74,4217.81 6333.95,4217.81 6333.95,4205.81 6296.74,4205.81 6296.74,4193.81 6333.95,4193.81 6333.95,4181.81 6296.74,4181.81 6296.74,4169.81 6333.95,4169.81 6333.95,4157.81 6296.74,4157.81 6296.74,4145.81 6333.95,4145.81 6333.95,4133.81 6296.74,4133.81 6296.74,4121.81 6333.95,4121.81 6333.95,4109.81 6296.74,4109.81 6296.74,4097.81 6333.95,4097.81 6333.95,4085.81 6296.74,4085.81 6296.74,4073.81 6333.95,4073.81 6333.95,4061.81 6305.67,4061.81 6305.67,4049.81 6333.95,4049.81 6333.95,4037.81 6329.39,4037.81 6329.39,4025.81 6333.95,4025.81 6333.95,4022.8 6333.95,3938.85 6345.95,3926.85 6524.01,3926.85 6527.52,3923.33 6527.52,3819.92 6550.52,3796.92 6867.37,3796.92 6876.8,3806.35 v1(6879.88,3806.35)
  Bottom Layer w6: U5.98@6805.08,5862.77 6847.64,5862.77 6854.65,5869.78 v1(6859.52,5869.78) ; U8.37@6868.35,3112.61 6868.35,3342.8 6879.11,3353.55 v1@6879.11,3807.78
FMC_D21: U5.156 U8.39 | length 4741
  Top Layer w6: v1(7688.52,3127.57) 7656.55,3159.54 7656.55,3250.28 7683.76,3277.5 7683.76,5841.03 7869.79,6027.06 v1(7921.86,6027.06)
  Bottom Layer w6: U8.39@6907.72,3112.61 6907.72,3049.7 6911.24,3046.18 7213.98,3046.18 7261.88,3046.18 7261.88,3080.67 7273.88,3080.67 7273.88,3044.07 7285.88,3044.07 7285.88,3111 7297.88,3111 7297.88,3044.07 7309.88,3044.07 7309.88,3111 7321.88,3111 7321.88,3044.12 7333.88,3044.12 7333.88,3111 7345.88,3111 7345.88,3068.12 7357.88,3068.12 7357.88,3111 7369.88,3111 7369.88,3092.12 7381.88,3092.12 7381.88,3111 7393.88,3111 7393.88,3099.78 7405.88,3099.78 7405.88,3111 7417.88,3111 7417.88,3099.78 7429.88,3099.78 7429.88,3111 7441.88,3111 7441.88,3099.78 7453.88,3099.78 7453.88,3111 7465.88,3111 7465.88,3099.78 7477.88,3099.78 7477.88,3111 7489.88,3111 7489.88,3099.78 7501.88,3099.78 7501.88,3111 7513.88,3111 7513.88,3099.78 7525.88,3099.78 7525.88,3111 7537.88,3111 7537.88,3099.78 7549.88,3099.78 7549.88,3111 7561.88,3111 7561.88,3099.78 7573.88,3099.78 7573.88,3111 7585.88,3111 7585.88,3099.78 7597.88,3099.78 7597.88,3111 7609.88,3111 7609.88,3099.78 7621.88,3099.78 7621.88,3111 7633.88,3111 7633.88,3099.78 7645.88,3099.78 7645.88,3107.78 7648.89,3107.78 7669.52,3107.78 v1@7688.52,3126.78 ; U5.156@7888.87,6058.51 U5.156@7887.76,6059.62 7911.37,6059.62 7921.86,6049.13 v1(7921.86,6027.06)
FMC_D22: U5.157 U8.40 | length 4739.2
  Top Layer w6: v1(7698.76,3168.11) 7672.06,3168.11 7668.55,3171.62 7668.55,3239.35 7695.76,3266.57 7695.76,5836.06 7849.61,5989.9 v1(7897.28,5989.9) ; v1@7896.51,5981.13 v1@7896.76,5980.88
  Bottom Layer w6: U8.40@6927.41,3112.61 6927.41,3063.62 6930.92,3060.11 7061.01,3060.11 7061.01,3182.49 7075.18,3196.66 7264.81,3196.66 7264.81,3194.79 7276.81,3194.79 7276.81,3196.78 7288.81,3196.78 7288.81,3171.9 7300.81,3171.9 7300.81,3196.78 7312.81,3196.78 7312.81,3171.9 7324.81,3171.9 7324.81,3196.78 7336.81,3196.78 7336.81,3171.9 7348.81,3171.9 7348.81,3196.78 7360.81,3196.78 7360.81,3171.9 7372.81,3171.9 7372.81,3196.78 7384.81,3196.78 7384.81,3173.63 7396.81,3173.63 7396.81,3196.78 7408.81,3196.78 7408.81,3173.63 7420.81,3173.63 7420.81,3196.78 7432.81,3196.78 7432.81,3173.63 7444.81,3173.63 7444.81,3196.78 7456.81,3196.78 7456.81,3173.63 7468.81,3173.63 7468.81,3196.78 7480.81,3196.78 7480.81,3173.63 7492.81,3173.63 7492.81,3196.78 7504.81,3196.78 7504.81,3173.63 7516.81,3173.63 7516.81,3196.78 7528.81,3196.78 7528.81,3173.58 7540.81,3173.58 7540.81,3196.78 7552.81,3196.78 7552.81,3173.63 7564.81,3173.63 7564.81,3196.78 7576.81,3196.78 7576.81,3172.51 7588.81,3172.51 7588.81,3196.78 7600.81,3196.78 7600.81,3173.63 7612.81,3173.63 7612.81,3196.78 7624.81,3196.78 7624.81,3172.57 7636.81,3172.57 7636.81,3196.66 7639.81,3196.66 7695.25,3196.66 7698.76,3193.15 v1(7698.76,3168.11) ; v1(7897.28,5989.9) 7897.44,5990.06 7927.08,5990.06 7936.26,5980.88 U5.157@7966.5,5980.88
FMC_D23: U5.158 U8.42 | length 4738.7
  Top Layer w6: v1(7698.76,3226.57) 7698.76,3250.61 7707.76,3259.61 7707.76,5831.09 7845.81,5969.13 7882.4,5969.13 7891.76,5959.78 v1(7918.3,5959.78)
  Bottom Layer w6: U8.42@6966.78,3112.61 6966.78,3075.62 6970.29,3072.11 7043.66,3072.11 7043.66,3211.43 7058.01,3225.78 7167.02,3225.78 7184.38,3225.78 7184.38,3235.17 7196.38,3235.17 7196.38,3222.01 7208.38,3222.01 7208.38,3261.52 7220.38,3261.52 7220.38,3222.01 7232.38,3222.01 7232.38,3261.52 7244.38,3261.52 7244.38,3222.01 7256.38,3222.01 7256.38,3261.52 7268.38,3261.52 7268.38,3222.01 7280.38,3222.01 7280.38,3261.52 7292.38,3261.52 7292.38,3222.01 7304.38,3222.01 7304.38,3261.52 7316.38,3261.52 7316.38,3222.01 7328.38,3222.01 7328.38,3261.52 7340.38,3261.52 7340.38,3222.01 7352.38,3222.01 7352.38,3261.52 7364.38,3261.52 7364.38,3222.01 7376.38,3222.01 7376.38,3261.52 7388.38,3261.52 7388.38,3222.01 7400.38,3222.01 7400.38,3261.52 7412.38,3261.52 7412.38,3222.01 7424.38,3222.01 7424.38,3261.52 7436.38,3261.52 7436.38,3222.01 7448.38,3222.01 7448.38,3261.52 7460.38,3261.52 7460.38,3222.01 7472.38,3222.01 7472.38,3225.78 7475.38,3225.78 v1@7697.52,3225.78 ; v1(7918.3,5959.78) 7919.72,5961.2 U5.158@7966.5,5961.2
FMC_D24: U5.159 U8.45 | length 4743
  Top Layer w6: v1(7652.1,2710.04) 7719.76,2777.71 7719.76,3788.78 7719.76,5822.21 7839.07,5941.51 7839.15,5941.43 v1(7874.58,5941.43)
  Bottom Layer w6: U8.45@6966.78,2679.53 6966.78,2715.73 6971.07,2720.03 6992.64,2720.03 7002.63,2710.04 7042.02,2710.04 7045.02,2710.04 7045.02,2720.03 7057.02,2720.03 7057.02,2697.66 7069.02,2697.66 7069.02,2720.03 7081.02,2720.03 7081.02,2697.66 7093.02,2697.66 7093.02,2720.03 7105.02,2720.03 7105.02,2697.66 7117.02,2697.66 7117.02,2720.03 7129.02,2720.03 7129.02,2697.66 7141.02,2697.66 7141.02,2720.03 7153.02,2720.03 7153.02,2697.66 7165.02,2697.66 7165.02,2720.03 7177.02,2720.03 7177.02,2697.66 7189.02,2697.66 7189.02,2720.03 7201.02,2720.03 7201.02,2697.66 7213.02,2697.66 7213.02,2720.03 7225.02,2720.03 7225.02,2697.66 7237.02,2697.66 7237.02,2720.03 7249.02,2720.03 7249.02,2697.66 7261.02,2697.66 7261.02,2720.03 7273.02,2720.03 7273.02,2697.66 7285.02,2697.66 7285.02,2720.03 7297.02,2720.03 7297.02,2697.66 7309.02,2697.66 7309.02,2720.03 7321.02,2720.03 7321.02,2698.04 7333.02,2698.04 7333.02,2710.04 7352.61,2710.04 7353.58,2710.04 7353.58,2695.2 7357.1,2691.69 7645.72,2691.69 7649.23,2695.2 7649.23,2707.18 v1(7652.1,2710.04) ; v1(7874.58,5941.43) 7877.52,5941.43 7890.1,5928.85 7934.73,5928.85 7947.39,5941.51 U5.159@7966.5,5941.51 U5.159@7965.39,5940.4
FMC_D25: U5.162 U8.47 | length 4740.6
  Top Layer w6: v1(7729.52,2706.52) 7731.76,2708.76 7731.76,5751.02 7731.94,5751.2 7731.94,5808.2 7785.81,5862.07 7861.6,5862.07 7876.92,5877.38 v1(7876.92,5878.3)
  Bottom Layer w6: U8.47@6927.41,2679.53 6927.41,2728.52 6930.92,2732.03 7372.81,2732.03 7387.81,2732.03 7387.81,2705.58 7399.81,2705.58 7399.81,2732.03 7411.81,2732.03 7411.81,2705.58 7423.81,2705.58 7423.81,2732.03 7435.81,2732.03 7435.81,2705.58 7447.81,2705.58 7447.81,2732.03 7459.81,2732.03 7459.81,2705.58 7471.81,2705.58 7471.81,2732.03 7483.81,2732.03 7483.81,2705.58 7495.81,2705.58 7495.81,2732.03 7507.81,2732.03 7507.81,2705.58 7519.81,2705.58 7519.81,2732.03 7531.81,2732.03 7531.81,2705.58 7543.81,2705.58 7543.81,2732.03 7555.81,2732.03 7555.81,2705.58 7567.81,2705.58 7567.81,2732.03 7579.81,2732.03 7579.81,2705.58 7591.81,2705.58 7591.81,2732.03 7603.81,2732.03 7603.81,2722.01 7615.81,2722.01 7615.81,2732.03 7651.81,2732.03 7726.01,2732.03 7729.52,2728.52 v1(7729.52,2706.52) ; v1(7876.92,5878.3) 7879.96,5881.35 7965.39,5881.35 U5.162@7966.5,5882.46
FMC_D26: U5.163 U8.48 | length 4823.4
  Top Layer w6: v1(7773,2706.98) 7773,2727.31 7744.52,2755.78 7744.52,3294.37 7744.52,3297.37 7743.76,3297.37 7743.76,3309.37 7763.6,3309.37 7763.6,3321.37 7743.76,3321.37 7743.76,3333.37 7763.6,3333.37 7763.6,3345.37 7743.76,3345.37 7743.76,3357.37 7763.6,3357.37 7763.6,3369.37 7743.76,3369.37 7743.76,3381.37 7763.6,3381.37 7763.6,3393.37 7743.76,3393.37 7743.76,3405.37 7763.6,3405.37 7763.6,3417.37 7743.76,3417.37 7743.76,3429.37 7763.6,3429.37 7763.6,3441.37 7743.76,3441.37 7743.76,3453.37 7763.6,3453.37 7763.6,3465.37 7743.76,3465.37 7743.76,3477.37 7763.6,3477.37 7763.6,3489.37 7743.76,3489.37 7743.76,3501.37 7763.6,3501.37 7763.6,3513.37 7743.76,3513.37 7743.76,3525.37 7763.6,3525.37 7763.6,3537.37 7743.76,3537.37 7743.76,3549.37 7763.6,3549.37 7763.6,3561.37 7743.76,3561.37 7743.76,3573.37 7763.6,3573.37 7763.6,3585.37 7743.76,3585.37 7743.76,3597.37 7763.26,3597.37 7763.26,3609.37 7744.52,3609.37 7744.52,3636.79 7744.52,5801 7785.01,5841.48 7883.94,5841.48 7895.04,5852.58 v1(7899.46,5852.58)
  Bottom Layer w6: U8.48@6907.72,2679.53 6907.72,2740.52 6911.24,2744.03 7755.53,2744.03 7773,2726.57 v1(7773,2706.98) ; v1(7899.46,5852.58) 7904.77,5852.58 7914.97,5862.77 U5.163@7966.5,5862.77 U5.163@7966.16,5863.12
FMC_D27: U5.164 U8.50 | length 4773.9
  Top Layer w6: v1@7784.52,2756.78 7756.52,2784.78 7756.52,2969.72 7756.52,2984.72 7782.76,2984.72 7782.76,2996.72 7756.52,2996.72 7756.52,3008.72 7782.76,3008.72 7782.76,3020.72 7756.52,3020.72 7756.52,3032.72 7782.76,3032.72 7782.76,3044.72 7756.52,3044.72 7756.52,3056.72 7782.76,3056.72 7782.76,3068.72 7756.52,3068.72 7756.52,3080.72 7782.76,3080.72 7782.76,3092.72 7756.52,3092.72 7756.52,3104.72 7782.76,3104.72 7782.76,3116.72 7756.52,3116.72 7756.52,3128.72 7782.76,3128.72 7782.76,3140.72 7756.52,3140.72 7756.52,3152.72 7782.76,3152.72 7782.76,3164.72 7756.52,3164.72 7756.52,3176.72 7778.64,3176.72 7778.64,3188.72 7756.52,3188.72 7756.52,3201.05 7756.52,3281.02 7757.65,3281.02 7762.24,3285.6 7769.02,3285.6 7782.76,3299.35 7782.76,3627.33 7756.52,3653.57 7756.52,5784.91 7784.86,5813.25 v1(7897.36,5813.25)
  Bottom Layer w6: U8.50@6868.35,2679.53 6868.35,2747.21 6877.18,2756.03 7782.4,2756.03 7786.65,2751.78 v1(7791.52,2751.78) ; v1(7897.36,5813.25) 7925.03,5813.25 7928.55,5816.76 7928.55,5839.57 7932.06,5843.09 U5.164@7966.5,5843.09
FMC_D28: U5.205 U8.51 | length 4736.9
  Top Layer w6: v1(7920.24,5044.66) 7923.4,5041.5 7923.4,5030.12 7926.01,5027.51 7926.01,3878.96 7966.8,3838.17 7966.8,3464.08 7966.8,3441.29 7961.29,3441.29 7961.29,3429.29 7974.06,3429.29 7974.06,3417.29 7948.01,3417.29 7948.01,3405.29 7966.8,3405.29 7966.8,3402.29 7966.8,3314.75 7966.8,3264.85 7977.9,3264.85 7977.9,3252.85 7953.14,3252.85 7953.14,3240.85 7982.76,3240.85 7982.76,3228.85 7953.14,3228.85 7953.14,3216.85 7982.76,3216.85 7982.76,3204.85 7953.14,3204.85 7953.14,3192.85 7982.76,3192.85 7982.76,3180.85 7953.14,3180.85 7953.14,3168.85 7982.76,3168.85 7982.76,3156.85 7953.14,3156.85 7953.14,3144.85 7982.76,3144.85 7982.76,3132.85 7953.14,3132.85 7953.14,3120.85 7982.76,3120.85 7982.76,3108.85 7953.14,3108.85 7953.14,3096.85 7982.76,3096.85 7982.76,3084.85 7953.14,3084.85 7953.14,3072.85 7982.76,3072.85 7982.76,3060.85 7953.14,3060.85 7953.14,3048.85 7982.76,3048.85 7982.76,3036.85 7953.14,3036.85 7953.14,3024.85 7982.76,3024.85 7982.76,3012.85 7953.14,3012.85 7953.14,3000.85 7982.76,3000.85 7982.76,2988.85 7953.14,2988.85 7953.14,2976.85 7982.76,2976.85 7982.76,2964.85 7953.14,2964.85 7953.14,2952.85 7982.76,2952.85 7982.76,2940.85 7953.14,2940.85 7953.14,2928.85 7982.76,2928.85 7982.76,2916.85 7953.14,2916.85 7953.14,2904.85 7982.76,2904.85 7982.76,2892.85 7953.14,2892.85 7953.14,2880.85 7982.76,2880.85 7982.76,2868.85 7953.14,2868.85 7953.14,2856.85 7982.76,2856.85 7982.76,2844.85 7953.14,2844.85 7953.14,2832.85 7982.76,2832.85 7982.76,2820.85 7953.14,2820.85 7953.14,2808.85 7966.8,2808.85 7966.8,2805.85 7966.8,2789.06 v1(7929.52,2751.78)
  Bottom Layer w6: U8.51@6848.67,2679.53 6848.67,2765.24 6852.18,2768.76 7505.49,2768.76 7512.09,2775.35 7825.71,2775.35 7849.28,2751.78 v1(7929.52,2751.78) ; v1(7920.24,5044.66) 7923.48,5041.42 7936.26,5041.42 7940.69,5036.99 7965.52,5036.99 U5.205@7966.5,5036
FMC_D29: U5.206 U8.53 | length 4734.7
  Top Layer w6: v1(7867.52,2782.56) 7892.75,2807.78 7917.29,2807.78 7917.29,3104.04 7905.29,3116.04 7905.29,3296.09 7905.29,3299.09 7897.45,3299.09 7897.45,3311.09 7910.77,3311.09 7910.77,3323.09 7897.45,3323.09 7897.45,3335.09 7932.56,3335.09 7932.56,3347.09 7897.45,3347.09 7897.45,3359.09 7932.56,3359.09 7932.56,3371.09 7897.45,3371.09 7897.45,3383.09 7932.56,3383.09 7932.56,3395.09 7897.45,3395.09 7897.45,3407.09 7932.56,3407.09 7932.56,3419.09 7897.45,3419.09 7897.45,3431.09 7932.56,3431.09 7932.56,3443.09 7897.45,3443.09 7897.45,3455.09 7932.56,3455.09 7932.56,3467.09 7897.45,3467.09 7897.45,3479.09 7932.56,3479.09 7932.56,3491.09 7897.45,3491.09 7897.45,3503.09 7932.56,3503.09 7932.56,3515.09 7897.45,3515.09 7897.45,3527.09 7932.56,3527.09 7932.56,3539.09 7897.45,3539.09 7897.45,3551.09 7932.56,3551.09 7932.56,3563.09 7897.45,3563.09 7897.45,3575.09 7932.56,3575.09 7932.56,3587.09 7897.45,3587.09 7897.45,3599.09 7932.56,3599.09 7932.56,3611.09 7897.45,3611.09 7897.45,3623.09 7932.56,3623.09 7932.56,3635.09 7897.45,3635.09 7897.45,3647.09 7932.56,3647.09 7932.56,3659.09 7897.45,3659.09 7897.45,3671.09 7932.56,3671.09 7932.56,3683.09 7897.45,3683.09 7897.45,3695.09 7932.56,3695.09 7932.56,3707.09 7897.45,3707.09 7897.45,3719.09 7932.56,3719.09 7932.56,3731.09 7898.73,3731.09 7898.73,3743.09 7905.29,3743.09 7905.29,3772.64 7905.29,4986.3 7905.01,4986.59 v1(7905.01,5018.82)
  Bottom Layer w6: U8.53@6809.3,2679.53 6809.3,2777.24 6812.81,2780.76 7500.52,2780.76 7507.12,2787.35 7830.68,2787.35 7831.96,2786.07 7855.01,2786.07 7855.08,2786 7864.08,2786 v1(7867.52,2782.56) ; v1(7905.01,5018.82) 7905.72,5018.1 7921.99,5018.1 7923.77,5016.32 U5.206@7966.5,5016.32
FMC_D30: U5.13 U8.54 | length 4742.2
  Top Layer w6: v1(7658.38,4996.63) 7658.38,4968.24 7669.35,4957.26 7669.35,3286.94 7642.37,3259.96 7642.37,3159.88 7642.37,3124.42 7653.94,3124.42 7653.94,3112.42 7641.45,3112.42 7641.45,3100.42 7707.76,3100.42 7707.76,3088.42 7638.52,3088.42 7638.52,3076.42 7707.76,3076.42 7707.76,3064.42 7638.81,3064.42 7638.81,3052.42 7707.76,3052.42 7707.76,3040.42 7638.52,3040.42 7638.52,3028.42 7707.76,3028.42 7707.76,3016.42 7640.5,3016.42 7640.5,3004.42 7707.76,3004.42 7707.76,2992.42 7639.58,2992.42 7639.58,2980.42 7707.76,2980.42 7707.76,2968.42 7639.01,2968.42 7639.01,2956.42 7707.76,2956.42 7707.76,2944.42 7638.52,2944.42 7638.52,2932.42 7707.76,2932.42 7707.76,2920.42 7638.52,2920.42 7638.52,2908.42 7707.76,2908.42 7707.76,2896.42 7638.52,2896.42 7638.52,2884.42 7707.76,2884.42 7707.76,2872.42 7638.52,2872.42 7638.52,2860.42 7645.61,2860.42 7648.61,2857.42 7683.25,2822.78 7683.25,2811.62 v1(7686.52,2808.35)
  Bottom Layer w6: U8.54@6789.61,2679.53 6789.61,2789.24 6793.13,2792.76 7486.99,2792.76 7493.59,2799.35 7674.01,2799.35 7683.01,2808.35 v1(7686.52,2808.35) ; U5.13@7651.54,4898.21 7651.54,4984.93 7658.38,4991.76 v1(7658.38,4996.63)